# EAGLE board Projeto - Conversor paralelo serial (EAGLE 9.7.0)

Size 167.45 x 129.21 mm. Coordinates in mm from the lower left corner, seen from the top.
Outline: 0,0 167.45,0 167.45,129.21 0,129.21 0,0
Copper layers (1*16): Top 0.035mm / dielectric 1.5mm / Bottom 0.035mm
Design rules "default": minimum track width 6mil, minimum drill 0.35mm, track to track 6mil, track to pad 6mil, pad to pad 6mil, via to via 6mil, smd to smd 6mil, copper to edge 40mil, drill to drill 6mil, minimum pad ring 10mil, minimum via ring 8mil, stop-mask expansion 4mil, vias tented up to drill 0mil, thermal gap 10mil

## Footprints (pad centres in the part's own frame; a part is rotated, then mirrored left to right if it is on the bottom)
LEDRD254W60D565H860B = drill 0.981 pad 1.581: 1 -1.27,0; 2 1.27,0
BATTERY-GENERIC = drill 1.118 pad 3.15 octagon: + 2.54,0; - -2.54,0
RESAD1016W63L850D250B = drill 0.83 pad 1.43: 1 -5.08,0; 2 5.08,0
SWITCH-MOMENTARY-PTH-6.5MM = drill 1.016 pad 1.88: 1 -3.251,2.261; 2 3.251,2.261; 3 -3.251,-2.261; 4 3.251,-2.261
DIP762W53P254L1969H508Q14B = drill 0.743 pad 1.343: 1 -3.81,7.62; 2 -3.81,5.08; 3 -3.81,2.54; 4 -3.81,0; 5 -3.81,-2.54; 6 -3.81,-5.08; 7 -3.81,-7.62; 8 3.81,-7.62; 9 3.81,-5.08; 10 3.81,-2.54; 11 3.81,0; 12 3.81,2.54; 13 3.81,5.08; 14 3.81,7.62

## Placement (x,y rotation side)
D1  RED  [LEDRD254W60D565H860B]  159.85,121.3 180 top
FUNC1  FUNCTION-GENERATOR  [BATTERY-GENERIC]  8.26,8.26 180 top
P1  BATTERYGENERIC  [BATTERY-GENERIC]  14.17,103.95 180 top
R1  1k  [RESAD1016W63L850D250B]  161.12,116.22 90 top
S1  SWITCH_MOMENTARY  [SWITCH-MOMENTARY-PTH-6.5MM]  61.8,30.05 90 top
S2  SWITCH_MOMENTARY  [SWITCH-MOMENTARY-PTH-6.5MM]  74.63,30.05 90 top
S3  SWITCH_MOMENTARY  [SWITCH-MOMENTARY-PTH-6.5MM]  87.96,29.88 90 top
S4  SWITCH_MOMENTARY  [SWITCH-MOMENTARY-PTH-6.5MM]  100.61,29.71 90 top
U1  74HC00_PDIP  [DIP762W53P254L1969H508Q14B]  71.58,85.12 90 top
U2  74HC00_PDIP  [DIP762W53P254L1969H508Q14B]  99.52,84.77 90 top
U3  74HC74_PDIP  [DIP762W53P254L1969H508Q14B]  126.75,84.77 90 top
U4  74HC74_PDIP  [DIP762W53P254L1969H508Q14B]  150.8,84.42 90 top
U5  74HC04_PDIP  [DIP762W53P254L1969H508Q14B]  71.93,58.95 90 top

## Library data of the parts
D1 = Tinkercad; CATEGORY: Opto-Electronic; SUB-CATEGORY: LED; VALUE: LED_RED
FUNC1 P1 R1 S1-S4 U1-U5 = Tinkercad

## Nets
D1_A: D1.1 R1.2
FUNC1+: FUNC1.+ U3.3 U3.11 U4.3 U4.11
P1+: P1.+ S1.2 S2.2 S3.2 S4.2 U1.1 U1.5 U1.9 U1.13 U1.14 U2.2 U2.5 U2.9 U2.13 U2.14 U3.14 U4.14 U5.14
P1-: D1.2 FUNC1.- P1.- U1.7 U2.7 U3.2 U3.7 U4.7 U5.7
U1_1Y: U1.3 U3.4
U1_2Y: U1.6 U3.1
U1_3Y: U1.8 U3.10
U1_4Y: U1.11 U3.13
U2_3B: S4.4 U2.10 U5.9
U3_1Q: U3.5 U3.12
U3_2Q: U3.9 U4.2
U4_1Q: U4.5 U4.12
U4_2Q: R1.1 U4.9
U4_CLR1: U2.6 U4.1
U4_CLR2: U2.11 U4.13
U4_PRE1: U2.3 U4.4
U4_PRE2: U2.8 U4.10
U5_1A: S1.4 U1.2 U5.1
U5_1Y: U1.4 U5.2
U5_2A: S2.4 U1.10 U5.3
U5_2Y: U1.12 U5.4
U5_3A: S3.4 U2.1 U5.5
U5_3Y: U2.4 U5.6
U5_4Y: U2.12 U5.8

## Tracks (layer width: path | path; a pad name or v marks a point on that pad's centre or on a via)
D1_A  (1 unrouted)
FUNC1+  (4 unrouted)
P1+  (17 unrouted)
P1-  (8 unrouted)
U1_1Y  (1 unrouted)
U1_2Y  (1 unrouted)
U1_3Y  (1 unrouted)
U1_4Y  (1 unrouted)
U2_3B  (2 unrouted)
U3_1Q  (1 unrouted)
U3_2Q  (1 unrouted)
U4_1Q  (1 unrouted)
U4_2Q  (1 unrouted)
U4_CLR1  (1 unrouted)
U4_CLR2  (1 unrouted)
U4_PRE1  (1 unrouted)
U4_PRE2  (1 unrouted)
U5_1A  (2 unrouted)
U5_1Y  (1 unrouted)
U5_2A  (2 unrouted)
U5_2Y  (1 unrouted)
U5_3A  (2 unrouted)
U5_3Y  (1 unrouted)
U5_4Y  (1 unrouted)